# Altium PCB LED.PcbDoc
Units mm, origin at the board's own origin, x right, y up, seen from the top; angles counter-clockwise.
Board outline 152.4 x 101.6 mm, 2 copper layers (Top Layer, Bottom Layer); 8 components, 5 nets, 16 pads, 2 vias.
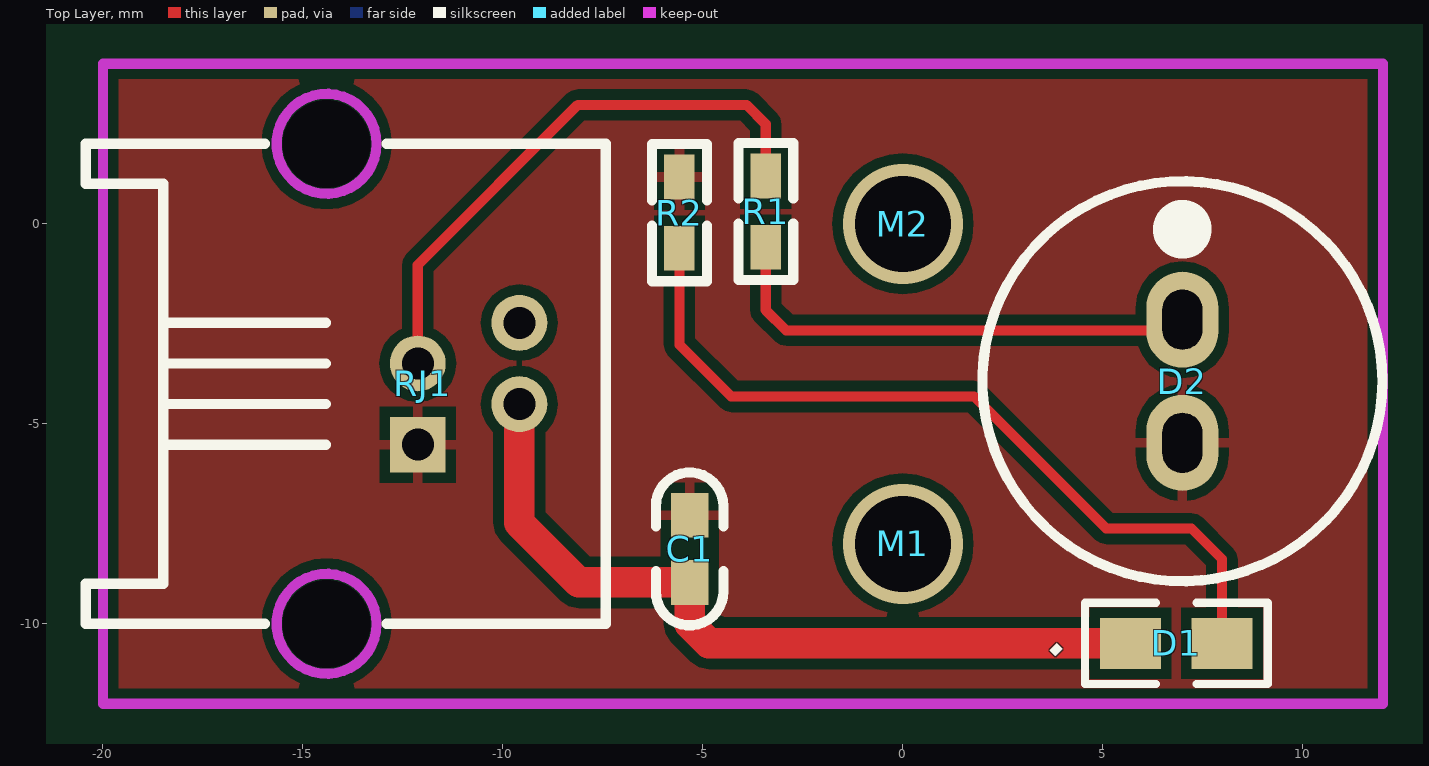
[diagram p0: Top Layer view]
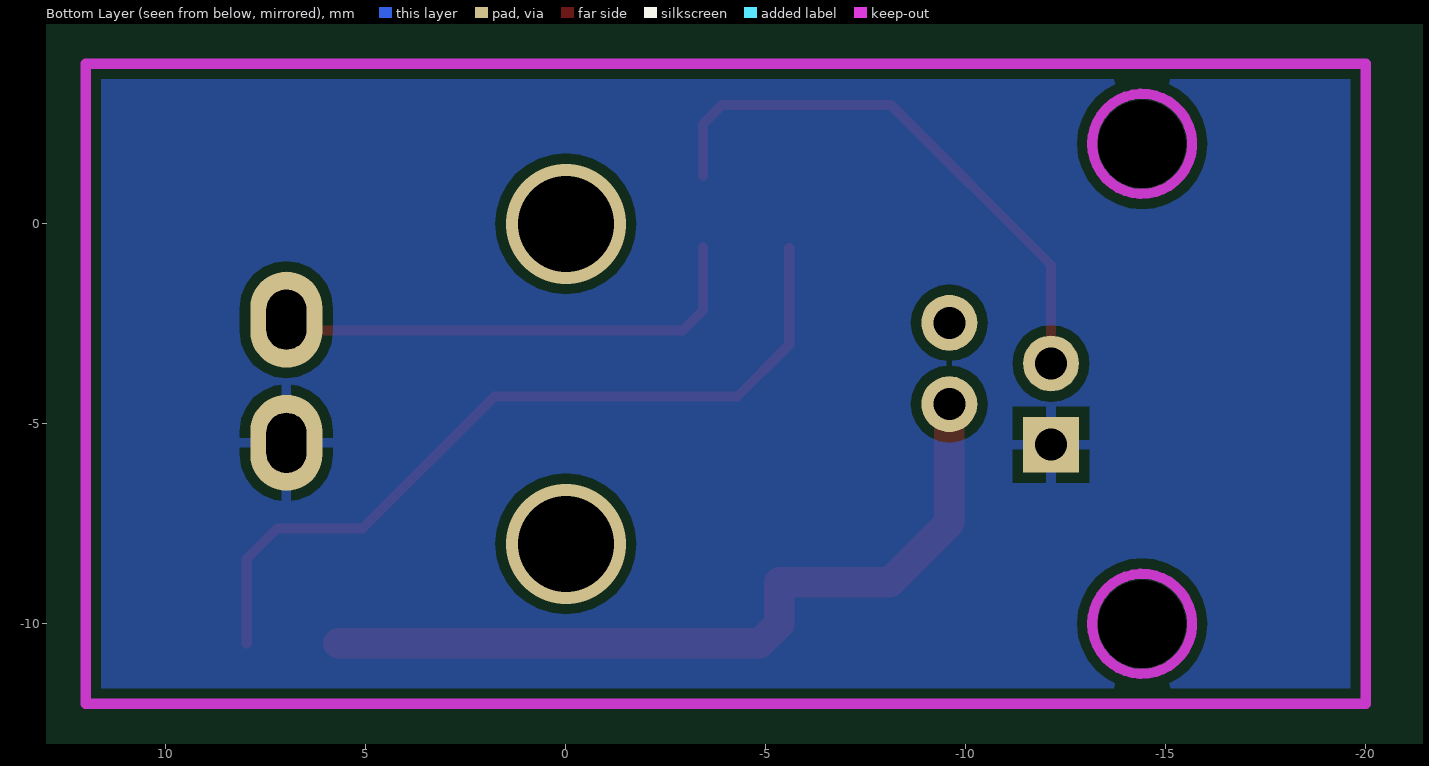
[diagram p1: Bottom Layer view, seen from below]

## Layer stack, top to bottom
Top Solder: solder mask 0.0102, Solder Resist, Dk 3.5
Top Layer: signal copper 0.0356
Dielectric 1: dielectric 0.32, FR-4, Dk 4.8
Bottom Layer: signal copper 0.0356
Bottom Solder: solder mask 0.0102, Solder Resist, Dk 3.5

## Board outline
-95.758,-62.738 56.642,-62.738 56.642,38.862 -95.758,38.862

## Design rules (kind name [scope] priority, off if disabled: settings)
Clearance [All] p1: gap=0.254
PolygonConnect [All] p1: connectstyle=Relief reliefconductorwidth=0.254 reliefentries=4 polygonreliefangle="90 Angle" airgapwidth=0.254
RoutingVias [All] p1: holewidth=0.711 width=1.27 viastyle="Through Hole" minholewidth=0.711 minwidth=1.27 maxholewidth=0.711 maxwidth=1.27
SolderMaskExpansion [All] p1: expansion=0.102
Width [All] p1: maxlimit=5.54 minlimit=0.254 preferedwidth=0.254
29 further rules are at their usual default settings.

## Components (designator, comment, footprint, x,y, rotation, side; value= is the part's Value field where it differs from the comment)
C1 "Cap" 0603_C -5.334,-8.128 r180 top
D1 "LED" 0805 6.833,-10.49 r270 top
D2 "LED" LED-10MM 6.985,-3.937 r270 top
M1 "M2" M2 0,-8 r0 top
M2 "M2" M2 0,0 r0 top
R1 "Res2" 0603_R -3.429,0.305 r180 top
R2 "Res2" 0603_R -5.588,0.279 r0 top
RJ1 "RJ11" RJ11 -12,-4 r90 top

## Footprints (in the part's own frame and the unit in brackets; to place one, negate y for a bottom-side part, rotate by r counter-clockwise, add the part's x,y. Pads: shape width x height; smd on the part's side, far side on the other; paste and mask are expansions set on the pad)
0603_C [mil]
  rect 37x44 smd: 1(0,-33) 2(0,33)
  silkscreen extent -33,-75 33,75
0603_R [mil]
  rect 30x44 smd: 1(0,35) 2(0,-35)
  silkscreen extent -27,-68 27,68, body extent -19,-52 20,50, height 21
0805 [mil]
  rect 50x60 smd: 1(0,-45) 2(0,45)
  silkscreen extent -40,-90 40,90
LED-10MM [mm]
  oval 2.4x1.8 hole 1 slot 1.5 at 0 deg: 1(-1.54,0) 2(1.54,0)
  silkscreen extent -5,-5 5,5
M2 [mm]
RJ11 [mm]
  round 2.1 hole 2.2 unplated: 0(-6,2.41) 0(6,2.41)
  rect 1.397x1.397 hole 0.8: 1(-1.524,0.13)
  round 1.397 hole 0.8: 2(-0.508,-2.41) 3(0.508,0.13) 4(1.524,-2.41)
  Keep-Out Layer circle w0.254: c-6,2.41 r1.25
  Keep-Out Layer circle w0.254: c6,2.41 r1.25
  silkscreen extent -6,-4.57 6,8.43

## Part data
C1: "Capacitor"
D1 D2: library part LED1, "Typical RED GaAs LED"
M1 M2: library part M3
R1 R2: "Resistor"

## Via types
v1: diameter 3, hole 2.4, Top Layer to Bottom Layer, 2 vias

## Nets (pads, with @x,y where several pads share a name; then routed paths per layer and width w, separated by ;. In a path a pad name is that pad's centre, name@x,y a point inside that pad or via, vN(x,y) a via of type N, cw(c..) or ccw(c..) an arc to the next point about the centre after c; other vN are vias at no path point)
GND: C1.1 D2.2 R2.1 RJ1.1
NetD1_2: D1.2 R2.2 | length 20.3
  Top Layer w0.254: R2.2 -5.588,-3.023 -4.293,-4.318 1.778,-4.318 5.08,-7.62 7.214,-7.62 7.976,-8.382 D1.2
NetD2_1: D2.1 R1.1 | length 12.2
  Top Layer w0.254: R1.1 -3.429,-2.159 -2.921,-2.667 D2.1@6.985,-2.667
NetR1_2: R1.2 RJ1.3 | length 14.3
  Top Layer w0.254: RJ1.3 -12.13,-1.03 -8.128,2.972 -3.912,2.972 -3.429,2.489 R1.2
VCC: C1.2 D1.1 RJ1.2 | length 20.1
  Top Layer w0.762: RJ1.2 -9.59,-7.479 -8.103,-8.966 C1.2 -5.334,-10.008 -4.851,-10.49 D1.1
pads on no net: RJ1.0 RJ1.4
copper on no net:
  other v1: 0,-8 0,0

## Polygon pours and split planes (outlines as drawn)
GND on Bottom Layer "Top Layer-No Net" (solid, remove dead copper, pour order 4): -20.701,5.105 -20.295,4.699 13.208,4.699 13.208,-12.624 12.802,-13.03 11.379,-11.608 -20.803,-11.608
GND on Top Layer "Top Layer-No Net" (solid, remove dead copper, pour order 6): -21.082,4.648 13.284,4.648 13.614,4.318 13.614,-13.716 -19.812,-13.716 -20.853,-12.675

## Keep-outs
Keep-Out Layer:
  lines w0.254: -20,-12 -20,4 12,4 12,-12 -20,-12

## Silkscreen, mask and mechanical layers (free items; w line width, h text height)
Top Overlay:
  text "." at 3.505,-10.516 h1.52 r315

## Text inside footprints (layer, text, board x,y; h text height)
RJ1: Mechanical 1 "1" at -14.43,-5.778 h1 r270; Mechanical 1 "2" at -8.842,-4.762 h1 r270; Mechanical 1 "3" at -14.43,-3.746 h1 r270; Mechanical 1 "4" at -8.842,-2.73 h1 r270; Mechanical 1 "1" at -19.002,-6.032 h1 r270; Mechanical 1 "4" at -19.002,-2.476 h1 r270